# EAGLE board Sunflower Elektronikentwurf (EAGLE 9.7.0)
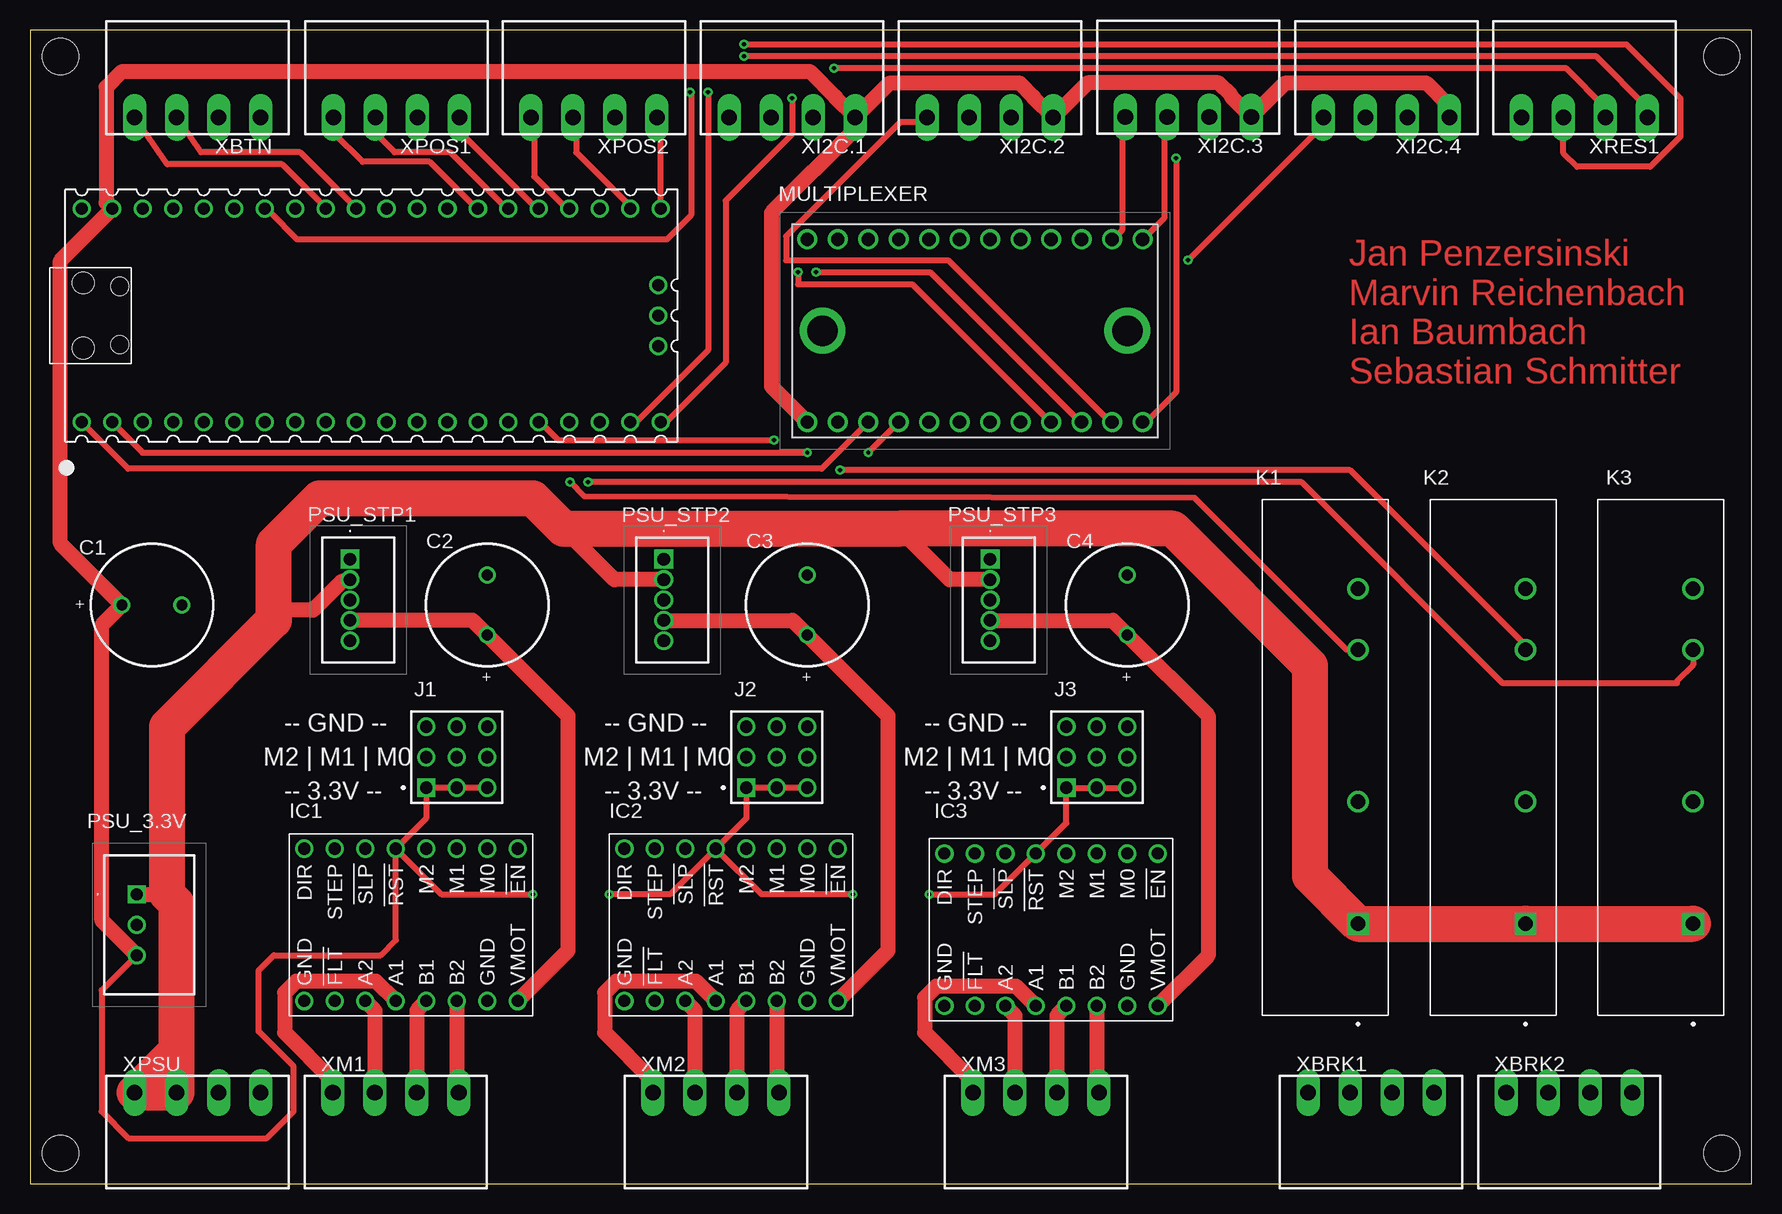
[diagram p0: board, top side]
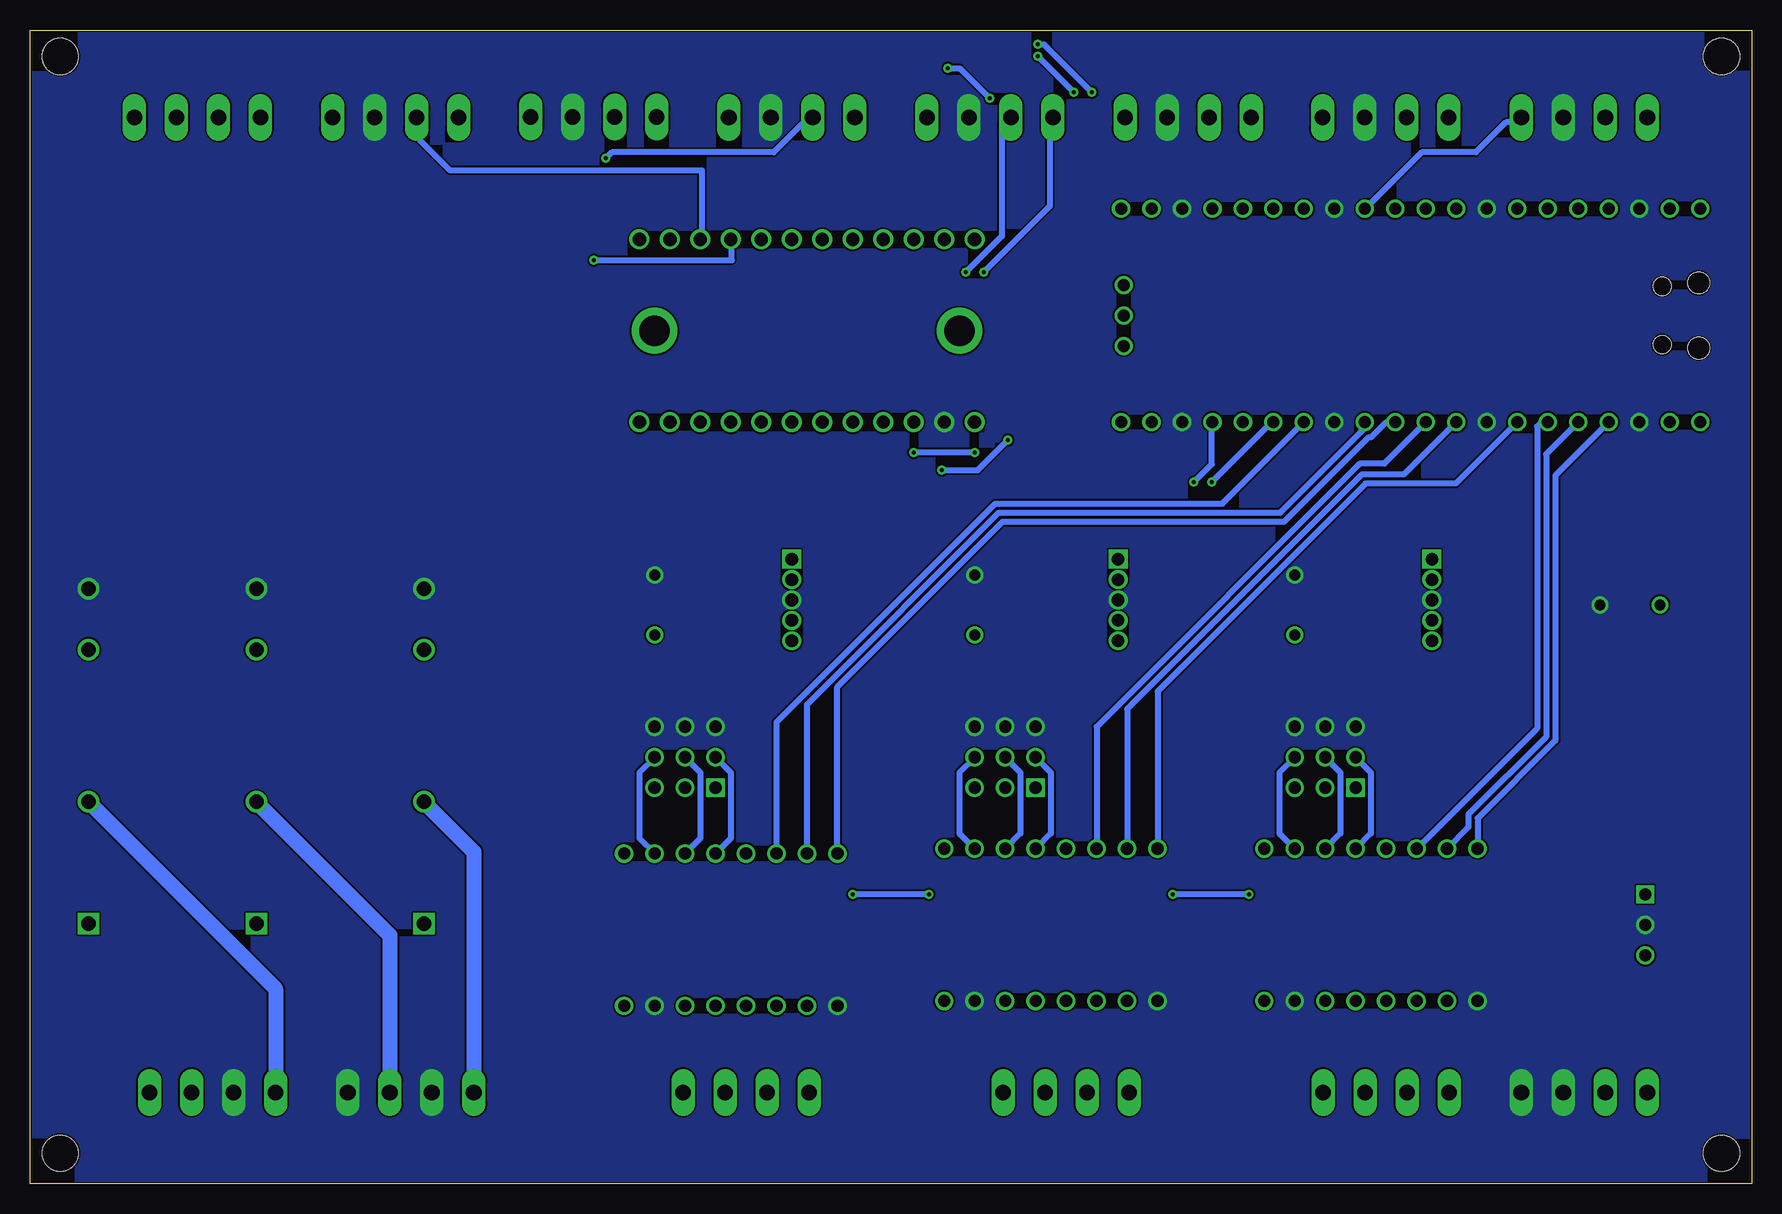
[diagram p1: board, bottom side, seen from below]

Size 143.49 x 96.19 mm. Coordinates in mm from the lower left corner, seen from the top.
Outline: 0,0 143.49,0 143.49,96.19 0,96.19 0,0
Copper layers (1*16): Top 0.035mm / dielectric 1.5mm / Bottom 0.035mm
Design rules "default *": minimum track width 0.5mm, minimum drill 0.35mm, track to track 6mil, track to pad 6mil, pad to pad 6mil, via to via 6mil, smd to smd 6mil, copper to edge 6mil, drill to drill 6mil, minimum pad ring 10mil, minimum via ring 8mil, stop-mask expansion 4mil, vias tented up to drill 0mil, thermal gap 10mil
Holes 3 mm at 2.54,2.54 140.97,2.54 2.54,93.98 140.97,93.98

## Footprints (pad centres in the part's own frame; a part is rotated, then mirrored left to right if it is on the bottom)
WCAP-ATET_10X16(DXL) = drill 0.9: 1 2.5,0; 2 -2.5,0
DRV8825 = drill 1.016: 1 -6.35,8.89; 2 -6.35,6.35; 3 -6.35,3.81; 4 -6.35,1.27; 5 -6.35,-1.27; 6 -6.35,-3.81; 7 -6.35,-6.35; 8 -6.35,-8.89; 9 6.35,-8.89; 10 6.35,-6.35; 11 6.35,-3.81; 12 6.35,-1.27; 13 6.35,1.27; 14 6.35,3.81; 15 6.35,6.35; 16 6.35,8.89
SAMTEC_TSW-103-07-G-T = drill 1.02 pad 1.37 square: 01 -2.54,-2.54 | drill 1.02 pad 1.37: 02 -2.54,0; 03 -2.54,2.54; 04 0,-2.54; 05 0,0; 06 0,2.54; 07 2.54,-2.54; 08 2.54,0; 09 2.54,2.54
RELAY_RP1A23D5 = drill 1.2 square: 1 -13.88,-2.71 | drill 1.2: 2 -3.72,-2.71; 3 8.98,-2.71; 4 14.06,-2.71
2717 = drill 1.11 pad 1.665: 1 -7.62,13.97; 2 -7.62,11.43; 3 -7.62,8.89; 4 -7.62,6.35; 5 -7.62,3.81; 6 -7.62,1.27; 7 -7.62,-1.27; 8 -7.62,-3.81; 9 -7.62,-6.35; 10 -7.62,-8.89; 11 -7.62,-11.43; 12 -7.62,-13.97; 13 7.62,-13.97; 14 7.62,-11.43; 15 7.62,-8.89; 16 7.62,-6.35; 17 7.62,-3.81; 18 7.62,-1.27; 19 7.62,1.27; 20 7.62,3.81; 21 7.62,6.35; 22 7.62,8.89; 23 7.62,11.43; 24 7.62,13.97 | drill 2.54 pad 3.81: 25 0,12.7; 26 0,-12.7
LC78_1820 = drill 1 pad 1.5 square: 1 0,0 | drill 1 pad 1.5: 2 2.54,0; 3 5.08,0
LMO78_241230 = drill 1.05 pad 1.5 square: 1 0,0 | drill 1.05 pad 1.5: 2 -1.7,0; 3 -3.4,0; 4 -5.1,0; 5 -6.8,0
PICO-PKG-TH = drill 1: 1 -8.89,24.13; 2 -8.89,21.59; 3 -8.89,19.05; 4 -8.89,16.51; 5 -8.89,13.97; 6 -8.89,11.43; 7 -8.89,8.89; 8 -8.89,6.35; 9 -8.89,3.81; 10 -8.89,1.27; 11 -8.89,-1.27; 12 -8.89,-3.81; 13 -8.89,-6.35; 14 -8.89,-8.89; 15 -8.89,-11.43; 16 -8.89,-13.97; 17 -8.89,-16.51; 18 -8.89,-19.05; 19 -8.89,-21.59; 20 -8.89,-24.13; 21 8.89,-24.13; 22 8.89,-21.59; 23 8.89,-19.05; 24 8.89,-16.51; 25 8.89,-13.97; 26 8.89,-11.43; 27 8.89,-8.89; 28 8.89,-6.35; 29 8.89,-3.81; 30 8.89,-1.27; 31 8.89,1.27; 32 8.89,3.81; 33 8.89,6.35; 34 8.89,8.89; 35 8.89,11.43; 36 8.89,13.97; 37 8.89,16.51; 38 8.89,19.05; 39 8.89,21.59; 40 8.89,24.13; 41 -2.54,-23.9; 42 0,-23.9; 43 2.54,-23.9 | hole 1.8: -2.725,24; 2.725,24 | hole 1.5: -2.425,20.97; 2.425,20.97
ANLOX_PT09304HBBN = drill 1.3 long: 1 -5.25,0; 2 -1.75,0; 3 1.75,0; 4 5.25,0

## Placement (x,y rotation side)
C1  100µF  [WCAP-ATET_10X16(DXL)]  10.16,48.26 180 top
C2  100µF  [WCAP-ATET_10X16(DXL)]  38.1,48.26 270 top
C3  100µF  [WCAP-ATET_10X16(DXL)]  64.77,48.26 270 top
C4  100µF  [WCAP-ATET_10X16(DXL)]  91.44,48.26 270 top
IC1  2133-DRV8825  [DRV8825]  31.75,21.59 270 top
IC2  2133-DRV8825  [DRV8825]  58.42,21.59 270 top
IC3  2133-DRV8825  [DRV8825]  85.09,21.18 270 top
J1  TSW-103-07-G-T  [SAMTEC_TSW-103-07-G-T]  35.56,35.56 0 top
J2  TSW-103-07-G-T  [SAMTEC_TSW-103-07-G-T]  62.23,35.56 0 top
J3  TSW-103-07-G-T  [SAMTEC_TSW-103-07-G-T]  88.9,35.56 0 top
K1  RP 530 060 3-0  [RELAY_RP1A23D5]  107.95,35.56 90 top
K2  RP 530 060 3-0  [RELAY_RP1A23D5]  121.92,35.56 90 top
K3  RP 530 060 3-0  [RELAY_RP1A23D5]  135.89,35.56 90 top
MULTIPLEXER  2717  [2717]  78.74,71.12 90 top
PSU_3.3V  LC78_1.8-2.0  [LC78_1820]  8.89,24.13 270 top
PSU_STP1  LMO78_2412-3.0  [LMO78_241230]  26.67,52.07 90 top
PSU_STP2  LMO78_2412-3.0  [LMO78_241230]  52.81,52.07 90 top
PSU_STP3  LMO78_2412-3.0  [LMO78_241230]  80.01,52.07 90 top
RASPBERRY_PI_PICO  RASPBERRY_PICOTH  [PICO-PKG-TH]  28.44,72.39 90 top
XBRK1  ANLOX_PT09304HBBN  [ANLOX_PT09304HBBN]  111.76,7.62 0 top
XBRK2  ANLOX_PT09304HBBN  [ANLOX_PT09304HBBN]  128.27,7.62 0 top
XBTN  ANLOX_PT09304HBBN  [ANLOX_PT09304HBBN]  13.97,88.9 180 top
XI2C.1  ANLOX_PT09304HBBN  [ANLOX_PT09304HBBN]  63.5,88.9 180 top
XI2C.2  ANLOX_PT09304HBBN  [ANLOX_PT09304HBBN]  80.01,88.9 180 top
XI2C.3  ANLOX_PT09304HBBN  [ANLOX_PT09304HBBN]  96.52,88.95 180 top
XI2C.4  ANLOX_PT09304HBBN  [ANLOX_PT09304HBBN]  113.03,88.9 180 top
XM1  ANLOX_PT09304HBBN  [ANLOX_PT09304HBBN]  30.48,7.62 0 top
XM2  ANLOX_PT09304HBBN  [ANLOX_PT09304HBBN]  57.15,7.62 0 top
XM3  ANLOX_PT09304HBBN  [ANLOX_PT09304HBBN]  83.82,7.62 0 top
XPOS1  ANLOX_PT09304HBBN  [ANLOX_PT09304HBBN]  30.53,88.9 180 top
XPOS2  ANLOX_PT09304HBBN  [ANLOX_PT09304HBBN]  46.99,88.9 180 top
XPSU  ANLOX_PT09304HBBN  [ANLOX_PT09304HBBN]  13.97,7.62 0 top
XRES1  ANLOX_PT09304HBBN  [ANLOX_PT09304HBBN]  129.54,88.9 180 top

## Library data of the parts
C1-C4 = Wurth_Capacitors_WCAP-ATET; DATASHEET-URL: https://www.we-online.com/catalog/datasheet/860130275006.pdf; DF: 18%; DIAMETER: 10mm; I-LEAK: 100uA; I-RIPPLE: 870mA; L: 16mm; OPERATING-TEMPERATURE: -40 °C up to +125 °C; PART-NUMBER: 860130275006; PITCH: 5mm; TECHNICAL-REFERENCE: ATGF160102M010DSPAAB000; VR: 10V(DC)
IC1-IC3 = pololu-stepper-driver
J1-J3 = TSW-103-07-G-T; AVAILABILITY: In Stock; CHECK_PRICES: https://www.snapeda.com/parts/TSW-103-07-G-T/Samtec+Inc./view-part/?ref=eda; DESCRIPTION: TSW - Samtec 2.54mm Pin Header 10.92mm Overall Pin Length (07) - Fast Stock; MF: Samtec Inc.; MP: TSW-103-07-G-T; PACKAGE: None; PRICE: None; PURCHASE-URL: https://www.snapeda.com/api/url_track_click_mouser/?unipart_id=3309796&manufacturer=Samtec Inc.&part_name=TSW-103-07-G-T&search_term=tsw-103-07-g-t; SNAPEDA_LINK: https://www.snapeda.com/parts/TSW-103-07-G-T/Samtec+Inc./view-part/?ref=snap
K1-K3 = RP1A23D5; AVAILABILITY: In Stock; CHECK_PRICES: https://www.snapeda.com/parts/RP1A23D5/Carlo+Gavazzi+Inc./view-part/?ref=eda; DESCRIPTION: Solid State Relay PC Pin PCB Mount Zero Crossing 5 A 32 V dc | Carlo Gavazzi Inc. RP1A23D5; MF: Carlo Gavazzi Inc.; MP: RP1A23D5; PACKAGE: SIP-4 Carlo Gavazzi Inc.; PRICE: None; PURCHASE-URL: https://www.snapeda.com/api/url_track_click_mouser/?unipart_id=3647319&manufacturer=Carlo Gavazzi Inc.&part_name=RP1A23D5&search_term=None; SNAPEDA_LINK: https://www.snapeda.com/parts/RP1A23D5/Carlo+Gavazzi+Inc./view-part/?ref=snap
MULTIPLEXER = TCA9548A_m; DESCRIPTION: Switch IC Development Tools TCA9548A I2C Multiplexer; HEIGHT: 1mm; MANUFACTURER_NAME: Adafruit; MANUFACTURER_PART_NUMBER: 2717; MOUSER_PART_NUMBER: 485-2717; MOUSER_PRICE-STOCK: https://www.mouser.com/Search/Refine.aspx?Keyword=485-2717
PSU_3.3V = LC78_1.8-2.0; DESCRIPTION: Non-Isolated PoL Module DC DC Converter 1 Output 1.8V 2A 4.5V - 30V Input; HEIGHT: 10.45mm; MANUFACTURER_NAME: Gaptec; MANUFACTURER_PART_NUMBER: LC78_03-2.0
PSU_STP1-PSU_STP3 = LMO78_2412-3.0; DESCRIPTION: Wide Input Non-Isolated & Regulated, Single Positive/Negative Output, Output Voltage= 5 ~ 15VDC, Output Current=3A, Input Voltage=24VDC, Capacitive load=500F; HEIGHT: 17mm; MANUFACTURER_NAME: Gaptec; MANUFACTURER_PART_NUMBER: LMO78_2412-3.0
RASPBERRY_PI_PICO = RpiPico
XBRK1 XBRK2 XBTN XI2C.1-XI2C.4 XM1-XM3 XPOS1 XPOS2 XPSU XRES1 = Metz Connect

## Nets
3V3(OUT): RASPBERRY_PI_PICO.36
+3.3V: C1.1 IC1.5 IC2.5 IC3.5 J1.01 J1.04 J1.07 J2.01 J2.04 J2.07 J3.01 J3.04 J3.07 MULTIPLEXER.1 PSU_3.3V.3 RASPBERRY_PI_PICO.39 XI2C.1.1 XI2C.2.1 XI2C.3.1 XI2C.4.1
+12V_RAW: K1.1 K2.1 K3.1 PSU_3.3V.1 PSU_STP1.2 PSU_STP2.2 PSU_STP3.2 XPSU.1 XPSU.2
+12V_STP1: C2.1 IC1.16 PSU_STP1.4
+12V_STP2: C3.1 IC2.16 PSU_STP2.4
+12V_STP3: C4.1 IC3.16 PSU_STP3.4
GND: C1.2 C2.2 C3.2 C4.2 IC1.9 IC1.15 IC2.9 IC2.15 IC3.9 IC3.15 J1.03 J1.06 J1.09 J2.03 J2.06 J2.09 J3.03 J3.06 J3.09 K1.4 K2.4 K3.4 MULTIPLEXER.2 PSU_3.3V.2 PSU_STP1.3 PSU_STP2.3 PSU_STP3.3 RASPBERRY_PI_PICO.3 RASPBERRY_PI_PICO.8 RASPBERRY_PI_PICO.13 RASPBERRY_PI_PICO.18 RASPBERRY_PI_PICO.23 RASPBERRY_PI_PICO.28 RASPBERRY_PI_PICO.33 RASPBERRY_PI_PICO.38 XBRK1.2 XBRK1.4 XBRK2.2 XBTN.2 XI2C.1.2 XI2C.2.2 XI2C.3.2 XI2C.4.2 XPOS1.2 XPOS2.2 XPSU.3 XPSU.4
N$1: MULTIPLEXER.3 RASPBERRY_PI_PICO.1
N$2: MULTIPLEXER.4 RASPBERRY_PI_PICO.2
N$3: IC1.12 XM1.1
N$4: IC1.11 XM1.2
N$5: IC1.13 XM1.3
N$6: IC1.14 XM1.4
N$7: IC2.12 XM2.1
N$8: IC2.11 XM2.2
N$9: IC2.13 XM2.3
N$10: IC2.14 XM2.4
N$11: IC3.12 XM3.1
N$12: IC3.11 XM3.2
N$13: IC3.13 XM3.3
N$14: IC3.14 XM3.4
N$15: IC1.8 RASPBERRY_PI_PICO.4
N$16: IC2.8 RASPBERRY_PI_PICO.7
N$17: IC3.8 RASPBERRY_PI_PICO.11
N$18: IC1.7 RASPBERRY_PI_PICO.5
N$19: IC2.7 RASPBERRY_PI_PICO.9
N$20: IC1.4 J1.02
N$21: RASPBERRY_PI_PICO.29 XBTN.1
N$22: RASPBERRY_PI_PICO.31 XBTN.3
N$23: RASPBERRY_PI_PICO.32 XBTN.4
N$24: MULTIPLEXER.9 XI2C.1.4
N$25: MULTIPLEXER.10 XI2C.1.3
N$26: MULTIPLEXER.11 XI2C.2.4
N$27: MULTIPLEXER.12 XI2C.2.3
N$28: MULTIPLEXER.13 XI2C.3.3
N$29: MULTIPLEXER.15 XI2C.4.3
N$30: MULTIPLEXER.14 XI2C.3.4
N$31: MULTIPLEXER.16 XI2C.4.4
N$32: RASPBERRY_PI_PICO.21 XPOS2.1
N$33: RASPBERRY_PI_PICO.22 XPOS2.3
N$34: RASPBERRY_PI_PICO.24 XPOS2.4
N$35: RASPBERRY_PI_PICO.25 XPOS1.1
N$36: RASPBERRY_PI_PICO.26 XPOS1.3
N$37: RASPBERRY_PI_PICO.27 XPOS1.4
N$39: K1.3 RASPBERRY_PI_PICO.15
N$40: K2.3 RASPBERRY_PI_PICO.16
N$41: K3.3 RASPBERRY_PI_PICO.17
N$42: K3.2 XBRK2.1
N$43: RASPBERRY_PI_PICO.20 XRES1.2
N$44: RASPBERRY_PI_PICO.19 XRES1.1
N$45: IC3.6 RASPBERRY_PI_PICO.14
N$46: IC2.6 RASPBERRY_PI_PICO.10
N$47: K1.2 XBRK1.1
N$48: K2.2 XBRK1.3
N$49: IC1.6 RASPBERRY_PI_PICO.6
N$51: RASPBERRY_PI_PICO.34 XRES1.3
N$52: IC1.3 J1.05
N$53: IC3.7 RASPBERRY_PI_PICO.12
N$54: IC1.2 J1.08
N$55: IC2.4 J2.02
N$56: IC2.3 J2.05
N$57: IC2.2 J2.08
N$58: IC3.4 J3.02
N$59: IC3.3 J3.05
N$60: IC3.2 J3.08
SWGND: RASPBERRY_PI_PICO.42
VBUS: RASPBERRY_PI_PICO.40

## Tracks (layer width: path | path; a pad name or v marks a point on that pad's centre or on a via)
+3.3V  (via drill 0.35)
  Top 0.508: IC2.5 59.69,30.48 J2.01 J2.04 J2.07 | J3.07 J3.04 J3.01 86.36,30.07 IC3.5 80.42,24.13 v74.93,24.13 | IC1.5 33.02,30.48 J1.01 J1.04 J1.07 | IC1.5 30.48,20.32 29.21,19.05 20.32,19.05 19.05,17.78 19.05,12.7 21.97,9.78 21.97,6.03 19.75,3.81 8.19,3.81 5.97,6.03 5.97,16.13 PSU_3.3V.3 | IC1.5 34.29,24.13 v41.91,24.13 | IC2.5 53.34,24.13 v48.26,24.13 | v68.58,24.13 60.96,24.13 IC2.5
  Top 1.27: PSU_3.3V.3 5.98,21.96 5.98,46.58 C1.1 2.53,53.39 2.53,76.96 RASPBERRY_PI_PICO.39 6.35,81.78 6.35,91.44 7.62,92.71 65.05,92.71 67.11,90.64 67.11,90.54 XI2C.1.1 | XI2C.4.1 118.28,89.88 116.42,91.73 104.56,91.73 XI2C.3.1 100.13,90.59 100.13,90.69 99.04,91.78 88.14,91.78 XI2C.2.1 83.62,90.54 83.62,90.64 82.53,91.73 71.58,91.73 XI2C.1.1 | XI2C.1.1 68.75,87.92 61.78,80.96 61.78,66.49 MULTIPLEXER.1
  Bottom 0.508: v41.91,24.13 v48.26,24.13 | v68.58,24.13 v74.93,24.13
+12V_RAW
  Top 1.27: PSU_3.3V.1 11.43,24.13 | PSU_STP3.2 76.63,50.37 72.39,54.61 | PSU_STP2.2 48.69,50.37 44.45,54.61 | PSU_STP1.2 26.55,50.24 26.02,50.24 23.6,47.83 20.32,47.83
  Top 3: 12.22,11.12 XPSU.1 XPSU.2 12.22,11.12 | 12.22,11.12 12.22,23.34 11.43,24.13 11.43,38.1 20.32,46.99 20.32,47.83 20.32,53.34 24.13,57.15 41.91,57.15 44.45,54.61 72.39,54.61 95.25,54.61 106.68,43.18 106.68,25.66 K1.1 K2.1 K3.1
+12V_STP1
  Top 1.27: IC1.16 44.83,19.43 44.83,39.03 C2.1 36.89,46.97 PSU_STP1.4
+12V_STP2
  Top 1.27: IC2.16 71.5,19.43 71.5,39.03 C3.1 63.56,46.97 PSU_STP2.4
+12V_STP3
  Top 1.27: IC3.16 98.17,19.02 98.17,39.03 C4.1 90.23,46.97 PSU_STP3.4
GND
  pour Bottom (no thermals): 0.75,0.75 142.76,0.75 142.76,95.77 0.75,95.77
N$1
  Top 0.508: MULTIPLEXER.3 65.97,59.62 8.19,59.62 RASPBERRY_PI_PICO.1
N$2  (via drill 0.35)
  Top 0.508: RASPBERRY_PI_PICO.2 9.39,60.96 v64.77,60.96 | MULTIPLEXER.4 v69.85,60.96
  Bottom 0.508: v64.77,60.96 v69.85,60.96
N$3
  Top 1.27: IC1.12 28.83,16.89 22.18,16.89 21.21,15.92 21.21,12.61 25.23,8.6 XM1.1
N$4
  Top 1.27: IC1.11 28.73,14.45 XM1.2
N$5
  Top 1.27: IC1.13 32.23,14.45 XM1.3
N$6
  Top 1.27: IC1.14 35.56,8.77 35.73,8.6 XM1.4
N$7
  Top 1.27: IC2.12 55.5,16.89 48.85,16.89 47.88,15.92 47.88,12.61 51.9,8.6 XM2.1
N$8
  Top 1.27: IC2.11 55.4,14.45 XM2.2
N$9
  Top 1.27: IC2.13 58.9,14.45 XM2.3
N$10
  Top 1.27: IC2.14 62.23,8.77 62.4,8.6 XM2.4
N$11
  Top 1.27: IC3.12 82.17,16.48 75.52,16.48 74.55,15.52 74.55,12.61 78.57,8.6 XM3.1
N$12
  Top 1.27: IC3.11 82.07,14.04 XM3.2
N$13
  Top 1.27: IC3.13 85.57,14.04 XM3.3
N$14
  Top 1.27: IC3.14 88.9,8.77 89.07,8.6 XM3.4
N$15
  Bottom 0.508: RASPBERRY_PI_PICO.4 16.38,59.05 16.38,36.96 22.86,30.48 IC1.8
N$16
  Bottom 0.508: RASPBERRY_PI_PICO.7 24.67,58.38 32.19,58.38 49.53,41.04 IC2.8
N$17
  Bottom 0.508: IC3.8 76.2,41.43 62.44,55.19 38.98,55.19 31.93,62.24 31.73,62.24 30.47,63.5 RASPBERRY_PI_PICO.11
N$18
  Bottom 0.508: RASPBERRY_PI_PICO.5 17.14,60.83 17.14,37.27 23.62,30.79 23.62,29.72 IC1.7
N$19
  Bottom 0.508: RASPBERRY_PI_PICO.9 28.99,59.14 32.5,59.14 52.07,39.57 IC2.7
N$20
  Bottom 0.508: J1.02 31.75,34.29 31.75,29.21 IC1.4
N$21
  Bottom 0.5: RASPBERRY_PI_PICO.29 32,81.5 27.5,86 23,86 20.5,88.5 19.5,88.5 XBTN.1
N$22
  Top 0.5: RASPBERRY_PI_PICO.31 27,81.5 22.5,86 14.25,86 XBTN.3
N$23
  Top 0.5: RASPBERRY_PI_PICO.32 24.5,81.5 21,85 11.45,85 XBTN.4
N$24  (via drill 0.35)
  Top 0.5: v64,76 64,75 73.5,75 85,63.5 MULTIPLEXER.9
  Bottom 0.5: v64,76 58.5,81.5 58.5,88.5 XI2C.1.4
N$25  (via drill 0.35)
  Top 0.5: v65.5,76 75,76 87.5,63.5 MULTIPLEXER.10
  Bottom 0.5: v65.5,76 62.5,79 62.5,88.5 62,88.5 XI2C.1.3
N$26
  Top 0.5: MULTIPLEXER.11 90,63.5 76.5,77 63,77 63,79 72.5,88.5 74.5,88.5 XI2C.2.4
N$27  (via drill 0.35)
  Top 0.5: v95.5,85.5 95.5,66 93,63.5 MULTIPLEXER.12
  Bottom 0.5: v95.5,85.5 95,86 81.5,86 79,88.5 78.5,88.5 XI2C.2.3
N$28
  Top 0.5: MULTIPLEXER.13 93,79 94.5,80.5 94.5,88.5 XI2C.3.3
N$29
  Bottom 0.5: MULTIPLEXER.15 87.5,79 87.5,84.5 108.5,84.5 111,87 111,88.5 XI2C.4.3
N$30
  Top 0.5: MULTIPLEXER.14 90.5,79 91,79.5 91,88.5 XI2C.3.4
N$31  (via drill 0.35)
  Top 0.5: v96.5,77 107.5,88 107.5,88.5 XI2C.4.4
  Bottom 0.5: v96.5,77 85,77 85,78.5 MULTIPLEXER.16
N$32
  Top 0.5: RASPBERRY_PI_PICO.21 52.5,81.5 52.5,88.5 XPOS2.1
N$33
  Top 0.5: RASPBERRY_PI_PICO.22 50,81.5 45.5,86 45.5,88.5 XPOS2.3
N$34
  Top 0.5: RASPBERRY_PI_PICO.24 44.5,81.5 42,84 42,88.5 XPOS2.4
N$35
  Top 0.5: RASPBERRY_PI_PICO.25 42,81.5 36,87.5 36,88.5 XPOS1.1
N$36
  Top 0.5: RASPBERRY_PI_PICO.26 39.5,81.5 35,86 30.38,86 30.35,86.06 28.78,87.63 XPOS1.3
N$37
  Top 0.5: RASPBERRY_PI_PICO.27 37,81.5 33.31,85.19 27.72,85.19 25.28,87.63 XPOS1.4
N$39  (via drill 0.35)
  Top 0.5: v45,58.5 46.19,57.31 97.05,57.18 109.69,44.54 K1.3
  Bottom 0.5: v45,58.5 40,63.5 RASPBERRY_PI_PICO.15
N$40  (via drill 0.35)
  Top 0.5: v62,62 44,62 42.5,63.5 RASPBERRY_PI_PICO.16 | v67.5,59.5 110,59.5 124.5,45 K2.3
  Bottom 0.5: v62,62 64.5,59.5 v67.5,59.5
N$41  (via drill 0.35)
  Top 0.5: v46.5,58.5 105.96,58.5 122.73,41.73 137.23,41.73 137.23,41.9 138.6,43.27 K3.3
  Bottom 0.5: v46.5,58.5 45,60 45,63.5 RASPBERRY_PI_PICO.17
N$42
  Bottom 1.27: K3.2 123.02,16.26 123.02,8.6 XBRK2.1
N$43  (via drill 0.35)
  Top 0.5: v63.5,90.5 63.5,87.5 57.96,81.96 57.96,68.46 53,63.5 RASPBERRY_PI_PICO.20 | v67,93 128.02,93 131.29,89.73 XRES1.2
  Bottom 0.5: v63.5,90.5 66,93 v67,93
N$44  (via drill 0.35)
  Top 0.5: v56.5,91 56.5,69.5 50.5,63.5 RASPBERRY_PI_PICO.19 | v59.5,94 130.52,94 134.79,89.73 XRES1.1
  Bottom 0.5: v59.5,94 v56.5,91
N$45
  Bottom 0.508: RASPBERRY_PI_PICO.14 44.12,56.71 63.07,56.71 81.28,38.5 IC3.6
N$46
  Bottom 0.508: RASPBERRY_PI_PICO.10 30.63,60.04 32.67,60.04 54.61,38.1 IC2.6
N$47
  Bottom 1.27: K1.2 106.51,27.69 106.51,8.6 XBRK1.1
N$48
  Bottom 1.27: K2.2 113.51,20.72 113.51,8.6 XBRK1.3
N$49
  Bottom 0.508: RASPBERRY_PI_PICO.6 17.53,63.5 17.9,63.13 17.9,37.98 IC1.6
N$51  (via drill 0.35)
  Top 0.5: RASPBERRY_PI_PICO.34 20,81 22.27,78.73 53.06,78.73 55.09,80.76 55.09,90.91 v55,91 | v59.5,95 133.02,95 137.53,90.49 137.53,87.31 135.01,84.78 128.92,84.78 127.79,85.91 XRES1.3
  Bottom 0.5: v55,91 59,95 v59.5,95
N$52
  Bottom 0.508: J1.05 34.29,34.29 34.29,29.21 IC1.3
N$53
  Bottom 0.508: IC3.7 78.74,39.96 62.76,55.95 39.29,55.95 32.25,62.99 RASPBERRY_PI_PICO.12
N$54
  Bottom 0.508: J1.08 39.37,34.29 39.37,29.21 IC1.2
N$55
  Bottom 0.508: J2.02 58.42,34.29 58.42,29.21 IC2.4
N$56
  Bottom 0.508: J2.05 60.96,34.29 60.96,29.21 IC2.3
N$57
  Bottom 0.508: J2.08 66.04,34.29 66.04,29.21 IC2.2
N$58
  Bottom 0.508: J3.02 85.09,34.29 85.09,28.8 IC3.4
N$59
  Bottom 0.508: J3.05 87.63,34.29 87.63,28.8 IC3.3
N$60
  Bottom 0.508: J3.08 92.71,34.29 92.71,28.8 IC3.2

## Text on the board
Top: Jan Penzersinski / Marvin Reichenbach / Ian Baumbach / Sebastian Schmitter
tNames: -- GND -- / M2 | M1 | M0 / -- 3.3V -- | -- GND -- / M2 | M1 | M0 / -- 3.3V -- | -- GND -- / M2 | M1 | M0 / -- 3.3V --